# Altium PCB acqboard.PcbDoc (part 3 of 5)
Units mil, origin at the board's own origin, x right, y up, seen from the top; angles counter-clockwise.
Board outline 7000 x 5250 mil, 4 copper layers (Top Layer, Internal Plane 1, Internal Plane 2, Bottom Layer); 570 components, 356 nets, 1973 pads, 766 vias.
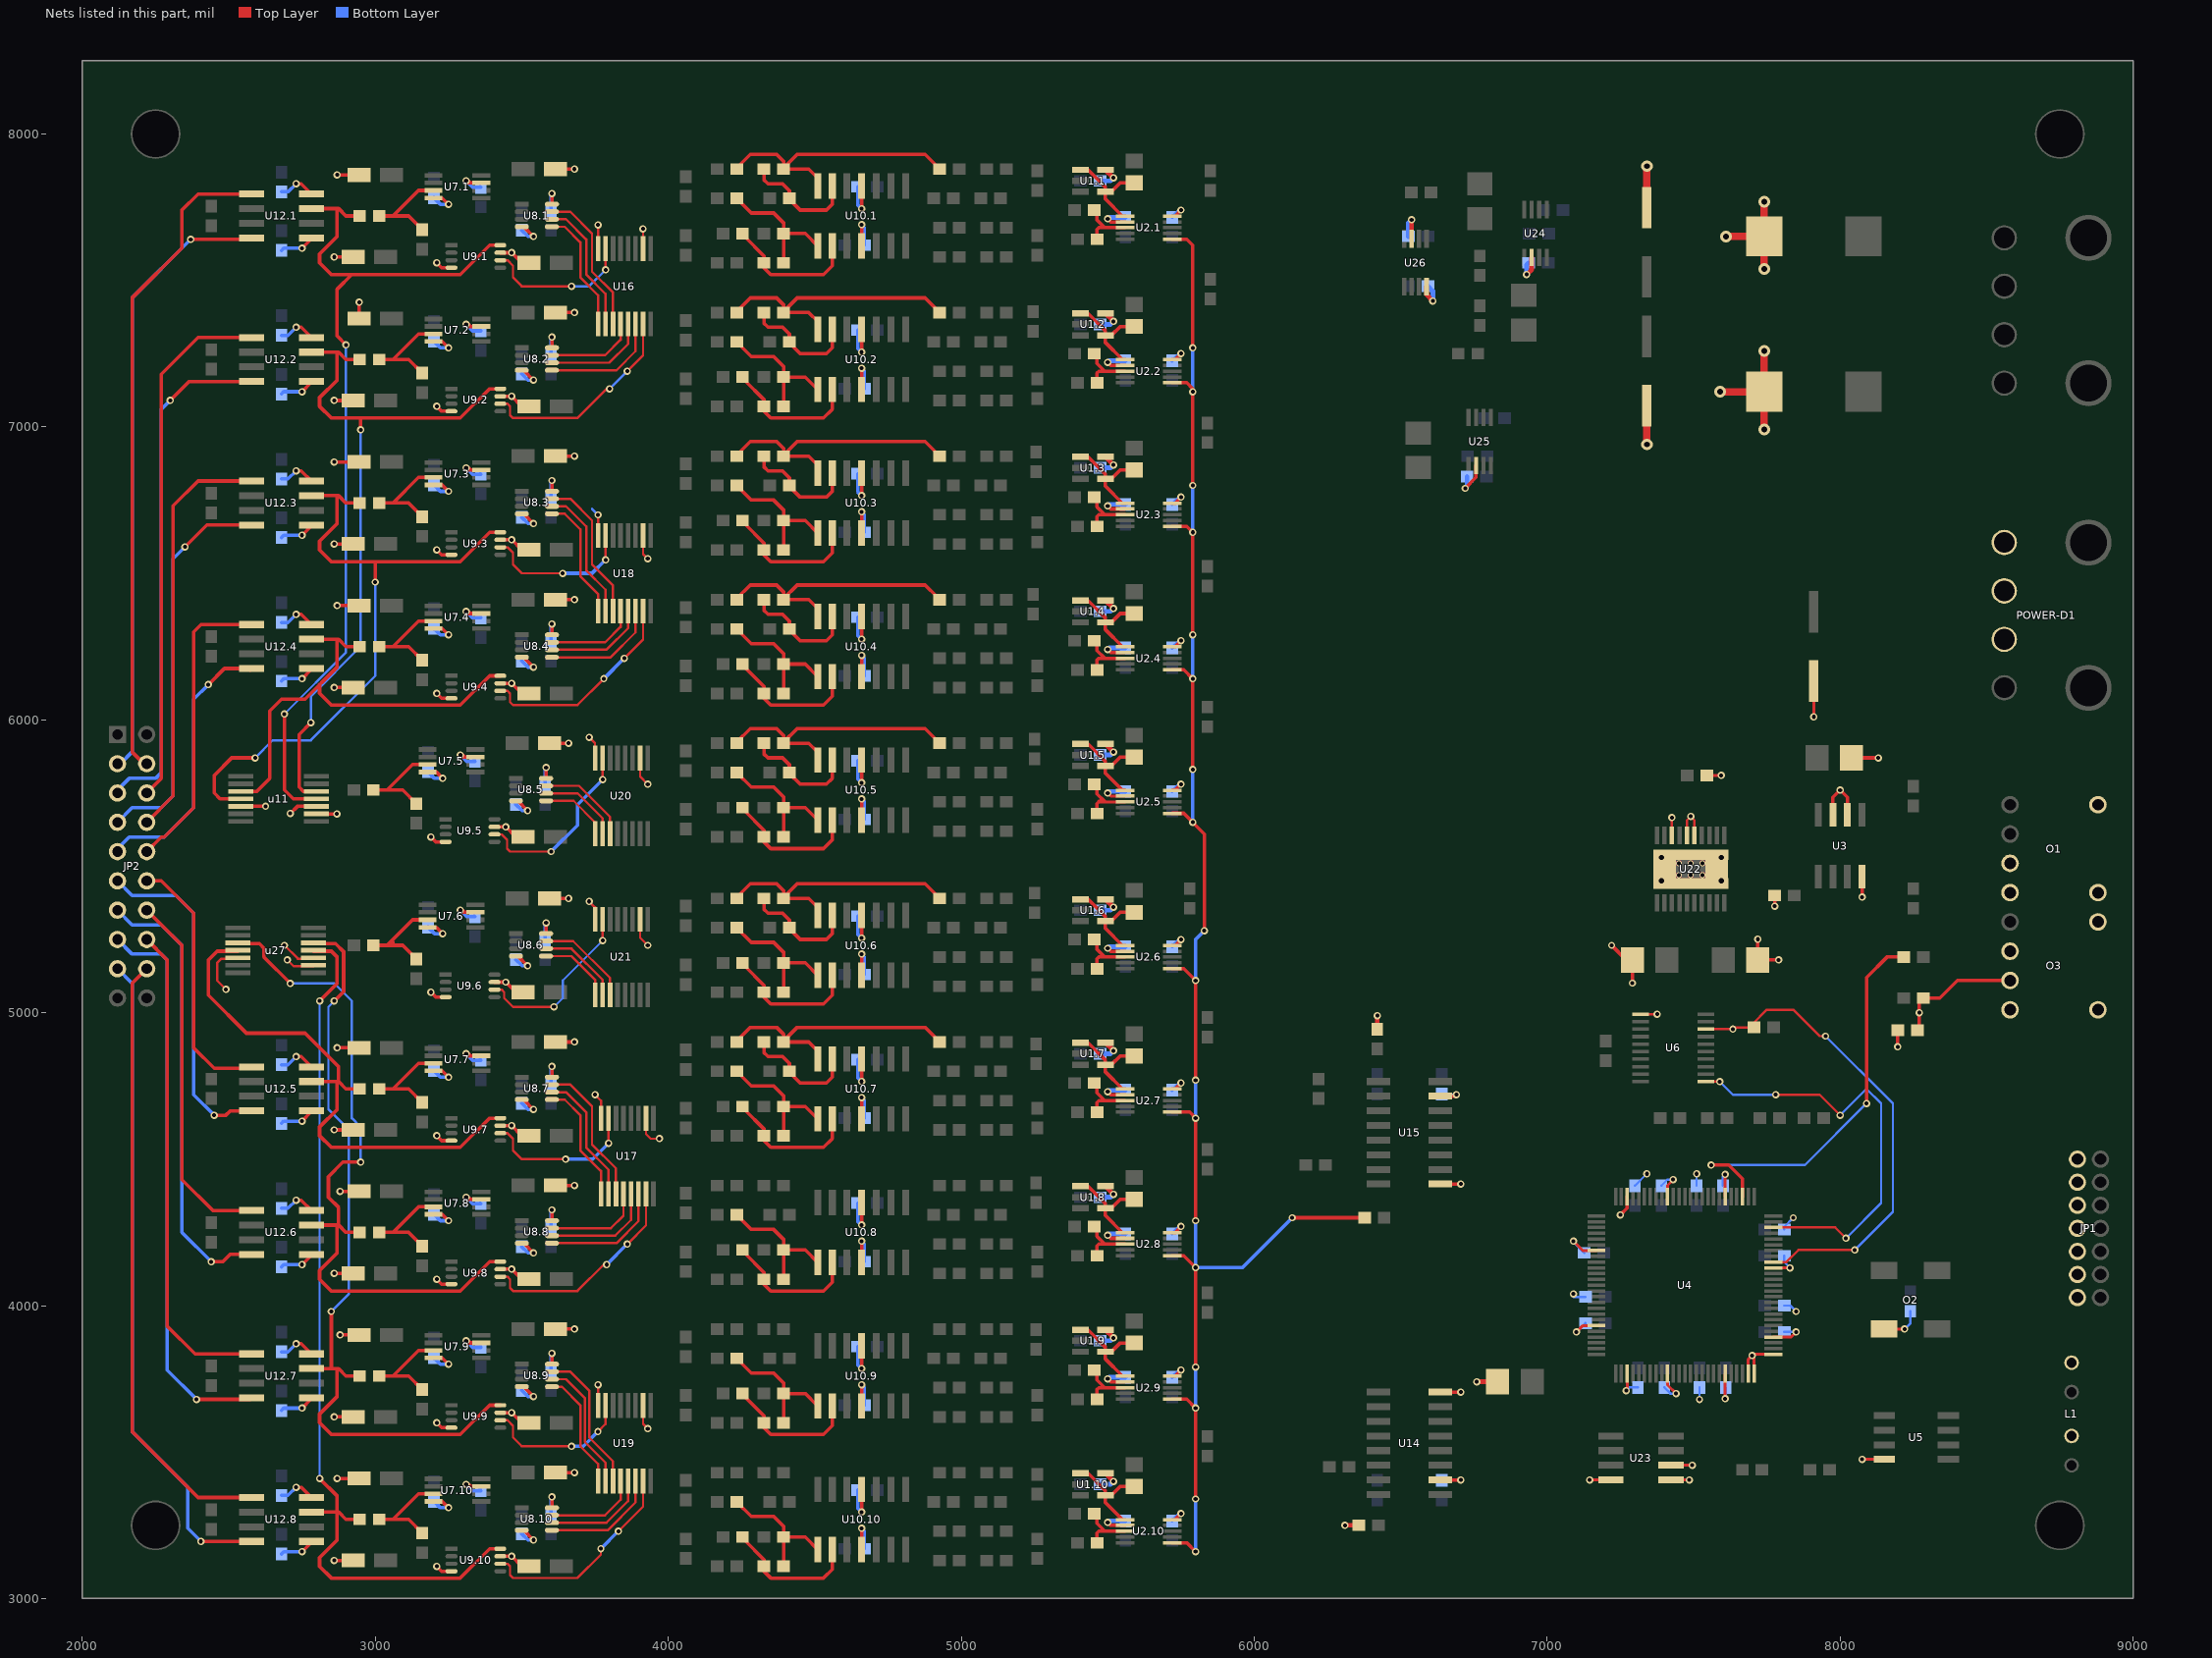
[diagram p5: the nets of this part, all layers, seen from the top]

## Via types
v1: diameter 25, hole 13.5, Top Layer to Bottom Layer, 753 vias
v2: diameter 40, hole 20, Top Layer to Bottom Layer, 13 vias

## Nets (pads, with @x,y where several pads share a name; then routed paths per layer and width w, separated by ;. In a path a pad name is that pad's centre, name@x,y a point inside that pad or via, vN(x,y) a via of type N, cw(c..) or ccw(c..) an arc to the next point about the centre after c; other vN are vias at no path point) (continued)
AVDD: C1.1.1 C1.2.1 C1.3.1 C1.4.1 C1.5.1 C1.6.1 C1.7.1 C1.8.1 C1.9.1 C1.10.1 C3.1.2 C3.2.2 C3.3.2 C3.4.2 C3.5.2 C3.6.2 C3.7.2 C3.8.2 C3.9.2 C3.10.2 C5.1.2 C5.2.2 C5.3.2 C5.4.2 C5.5.2 C5.6.2 C5.7.2 C5.8.2 C5.9.2 C5.10.2 C28.1.1 C28.2.1 C28.3.1 C28.4.1 C28.5.1 C28.6.1 C28.7.1 C28.8.1 C28.9.1 C28.10.1 C29.1.1 C29.2.1 C29.3.1 C29.4.1 C29.5.1 C29.6.1 C29.7.1 C29.8.1 C29.9.1 C29.10.1 C33.1.1 C33.2.1 C33.3.1 C33.4.1 C33.5.1 C33.6.1 C33.7.1 C33.8.1 C33.9.1 C33.10.1 C43.1.1 C43.2.1 C43.3.1 C43.4.1 C43.5.1 C43.6.1 C43.7.1 C43.8.1 C45.1.1 C45.2.1 C45.3.1 C45.4.1 C45.5.1 C45.6.1 C45.7.1 C45.8.1 C55.1 C58.2 C65.1 C69.1 C71.1.2 C71.2.2 C71.3.2 C71.4.2 C71.5.2 C71.6.2 C71.7.2 C71.8.2 C71.9.2 C71.10.2 L2.2 R35.2 R39.2 U1.1.5 U1.2.5 U1.3.5 U1.4.5 U1.5.5 U1.6.5 U1.7.5 U1.8.5 U1.9.5 U1.10.5 U2.1.2 U2.1.10 U2.2.2 U2.2.10 U2.3.2 U2.3.10 U2.4.2 U2.4.10 U2.5.2 U2.5.10 U2.6.2 U2.6.10 U2.7.2 U2.7.10 U2.8.2 U2.8.10 U2.9.2 U2.9.10 U2.10.2 U2.10.10 U7.1.7 U7.2.7 U7.3.7 U7.4.7 U7.5.7 U7.6.7 U7.7.7 U7.8.7 U7.9.7 U7.10.7 U8.1.8 U8.2.8 U8.3.8 U8.4.8 U8.5.8 U8.6.8 U8.7.8 U8.8.8 U8.9.8 U8.10.8 U9.1.4 U9.2.4 U9.3.4 U9.4.4 U9.5.4 U9.6.4 U9.7.4 U9.8.4 U9.9.4 U9.10.4 U10.1.4 U10.2.4 U10.3.4 U10.4.4 U10.5.4 U10.6.4 U10.7.4 U10.8.4 U10.9.4 U10.10.4 u11.2 u11.12 U12.1.8 U12.2.8 U12.3.8 U12.4.8 U12.5.8 U12.6.8 U12.7.8 U12.8.8 U16.10 U16.16 U17.10 U17.16 U18.10 U18.16 U19.10 U19.16 U20.10 U20.16 U21.10 U21.16 U24.2 U25.2 U26.7 u27.2 u27.12 | length 11836.4
  Top Layer w8: v1(2490,5080) 2460,5110 2460,5170 2474.41,5184.41 u27.12@2531.06,5184.41 ; v1(2700,5180) 2721.18,5158.82 u27.2@2788.94,5158.82 ; v1(3730,5380) 3750.43,5359.57 U21.16@3750.43,5318.94 ; v1(3730,5940) 3750,5920 U20.16@3750,5890 ; v1(3750,4720) 3770.43,4699.57 U17.16@3770.43,4638.94 ; U19.16@3760.43,3658.94 v1(3760.43,3729.57) ; U18.16@3760.43,6628.94 v1(3760.43,6699.57) ; U16.16@3760.43,7608.94 v1(3760.43,7689.57) ; U21.10@3903.98,5318.94 3903.98,5256.02 v1(3930,5230) ; U20.10@3903.98,5868.94 3903.98,5806.02 v1(3930,5780) ; U19.10@3913.98,3658.94 3913.98,3596.02 v1(3930,3580) ; U18.10@3913.98,6628.94 3913.98,6566.02 v1(3930,6550) ; U16.10@3913.98,7608.94 v1(3913.98,7676.02) ; U17.10@3923.98,4638.94 3923.98,4586.02 3940,4570 v1(3970,4570)
  Top Layer w10: v1(5500,5750) 5510.31,5739.69 U2.5.2@5559.29,5739.69
  Top Layer w12: u11.12@2541.06,5704.41 v1(2625.59,5704.41) ; v1(2730,3380) 2747.36,3380 U12.8.8@2782.36,3345 ; v1(2730,3870) 2747.36,3870 U12.7.8@2782.36,3835 ; v1(2730,4360) 2747.36,4360 U12.6.8@2782.36,4325 ; v1(2730,4850) 2747.36,4850 U12.5.8@2782.36,4815 ; v1(2730,6360) 2747.36,6360 U12.4.8@2782.36,6325 ; v1(2730,6850) 2747.36,6850 U12.3.8@2782.36,6815 ; v1(2730,7340) 2747.36,7340 U12.2.8@2782.36,7305 ; v1(2730,7830) 2747.36,7830 U12.1.8@2782.36,7795 ; u11.2@2798.94,5678.82 v1(2868.82,5678.82) ; v1(2860,6880) C45.3.1@2944.88,6880 ; v1(2870,3410) C45.8.1@2944.88,3410 ; v1(2870,4880) C45.5.1@2944.88,4880 ; v1(2870,6390) C45.4.1@2944.88,6390 ; v1(2870,7860) C45.1.1@2944.88,7860 ; v1(2880,3900) C45.7.1@2944.88,3900 ; v1(2880,4390) C45.6.1@2944.88,4390 ; C45.2.1@2944.88,7370 v1(2944.88,7425.12) ; v1(3190,5070) 3206.77,5053.23 U9.6.4@3240,5053.23 ; v1(3190,5600) 3206.77,5583.23 U9.5.4@3240,5583.23 ; v1(3210,3110) 3226.77,3093.23 U9.10.4@3260,3093.23 ; v1(3210,3600) 3226.77,3583.23 U9.9.4@3260,3583.23 ; v1(3210,4090) 3226.77,4073.23 U9.8.4@3260,4073.23 ; v1(3210,4580) 3226.77,4563.23 U9.7.4@3260,4563.23 ; v1(3210,6090) 3226.77,6073.23 U9.4.4@3260,6073.23 ; v1(3210,6580) 3226.77,6563.23 U9.3.4@3260,6563.23 ; v1(3210,7070) 3226.77,7053.23 U9.2.4@3260,7053.23 ; v1(3210,7560) 3226.77,7543.23 U9.1.4@3260,7543.23 ; v1(3290,5350) 3298.18,5350 v1@3301.3,5346.89 ; v1(3290,5880) 3298.18,5880 v1@3301.3,5876.89 ; v1@3297.2,5342.8 U7.6.7@3341.69,5342.8 ; v1@3297.2,5872.8 U7.5.7@3341.69,5872.8 ; v1(3310,3390) 3318.18,3390 v1@3321.3,3386.89 ; v1(3310,3880) 3318.18,3880 v1@3321.3,3876.89 ; v1(3310,4370) 3318.18,4370 v1@3321.3,4366.89 ; v1(3310,4860) 3318.18,4860 v1@3321.3,4856.89 ; v1(3310,6370) 3318.18,6370 v1@3321.3,6366.89 ; v1(3310,6860) 3318.18,6860 v1@3321.3,6856.89 ; v1(3310,7350) 3318.18,7350 v1@3321.3,7346.89 ; v1(3310,7840) 3318.18,7840 v1@3321.3,7836.89 ; v1@3317.2,3382.8 U7.10.7@3361.69,3382.8 ; v1@3317.2,3872.8 U7.9.7@3361.69,3872.8 ; v1@3317.2,4362.8 U7.8.7@3361.69,4362.8 ; v1@3317.2,4852.8 U7.7.7@3361.69,4852.8 ; v1@3317.2,6362.8 U7.4.7@3361.69,6362.8 ; v1@3317.2,6852.8 U7.3.7@3361.69,6852.8 ; v1@3317.2,7342.8 U7.2.7@3361.69,7342.8 ; v1@3317.2,7832.8 U7.1.7@3361.69,7832.8 ; U8.6.8@3583.15,5270 v1(3583.15,5306.85) ; U8.5.8@3583.15,5800 v1(3583.15,5836.85) ; C33.6.1@3595.12,5390 v1(3660,5390) ; C33.5.1@3595.12,5920 v1(3660,5920) ; U8.10.8@3603.15,3310 v1(3603.15,3346.85) ; U8.9.8@3603.15,3800 v1(3603.15,3836.85) ; U8.8.8@3603.15,4290 v1(3603.15,4326.85) ; U8.7.8@3603.15,4780 v1(3603.15,4816.85) ; U8.4.8@3603.15,6290 v1(3603.15,6326.85) ; U8.3.8@3603.15,6780 v1(3603.15,6816.85) ; U8.2.8@3603.15,7270 v1(3603.15,7306.85) ; U8.1.8@3603.15,7760 v1(3603.15,7796.85) ; C33.10.1@3615.12,3430 v1(3680,3430) ; C33.9.1@3615.12,3920 v1(3680,3920) ; C33.8.1@3615.12,4410 v1(3680,4410) ; C33.7.1@3615.12,4900 v1(3680,4900) ; C33.4.1@3615.12,6410 v1(3680,6410) ; C33.3.1@3615.12,6900 v1(3680,6900) ; C33.2.1@3615.12,7390 v1(3680,7390) ; C33.1.1@3615.12,7880 v1(3680,7880) ; U10.10.4@4660,3167.64 v1(4660,3240) ; U10.9.4@4660,3657.64 v1(4660,3730) ; U10.8.4@4660,4147.64 v1(4660,4220) ; U10.7.4@4660,4637.64 v1(4660,4710) ; U10.6.4@4660,5127.64 v1(4660,5200) ; U10.5.4@4660,5657.64 v1(4660,5730) ; U10.4.4@4660,6147.64 v1(4660,6220) ; U10.3.4@4660,6637.64 v1(4660,6710) ; U10.2.4@4660,7127.64 v1(4660,7200) ; U10.1.4@4660,7617.64 v1(4660,7690) ; v1(5500,3260) 5510.31,3249.68 U2.10.2@5559.29,3249.68 ; v1(5500,3750) 5510.31,3739.68 U2.9.2@5559.29,3739.68 ; v1(5500,4240) 5510.31,4229.69 U2.8.2@5559.29,4229.69 ; v1(5500,4730) 5510.31,4719.69 U2.7.2@5559.29,4719.69 ; v1(5500,5220) 5510.31,5209.69 U2.6.2@5559.29,5209.69 ; v1(5500,6240) 5510.31,6229.69 U2.4.2@5559.29,6229.69 ; v1(5500,6730) 5510.31,6719.69 U2.3.2@5559.29,6719.69 ; v1(5500,7220) 5510.31,7209.69 U2.2.2@5559.29,7209.69 ; v1(5500,7710) 5510.31,7699.69 U2.1.2@5559.29,7699.69 ; U2.10.10@5720.71,3269.37 5729.37,3269.37 v1(5750,3290) ; U2.9.10@5720.71,3759.37 5729.37,3759.37 v1(5750,3780) ; U2.8.10@5720.71,4249.37 5729.37,4249.37 v1(5750,4270) ; U2.7.10@5720.71,4739.37 5729.37,4739.37 v1(5750,4760) ; U2.6.10@5720.71,5229.37 5729.37,5229.37 v1(5750,5250) ; U2.5.10@5720.71,5759.37 5729.37,5759.37 v1(5750,5780) ; U2.4.10@5720.71,6249.37 5729.37,6249.37 v1(5750,6270) ; U2.3.10@5720.71,6739.37 5729.37,6739.37 v1(5750,6760) ; U2.2.10@5720.71,7229.37 5729.37,7229.37 v1(5750,7250) ; U2.1.10@5720.71,7719.37 5729.37,7719.37 v1(5750,7740) ; v1(6720,6790) 6757.2,6827.2 U25.2@6757.2,6868.31
  Top Layer w16: U1.10.5@5492.32,3427.4 5519.72,3400 v1(5520,3400) ; U1.9.5@5492.32,3917.4 5519.72,3890 v1(5520,3890) ; U1.8.5@5492.32,4407.4 5519.72,4380 v1(5520,4380) ; U1.7.5@5492.32,4897.4 5519.72,4870 v1(5520,4870) ; U1.6.5@5492.32,5387.4 5519.72,5360 v1(5520,5360) ; U1.5.5@5492.32,5917.4 5519.72,5890 v1(5520,5890) ; U1.4.5@5492.32,6407.4 5519.72,6380 v1(5520,6380) ; U1.3.5@5492.32,6897.4 5519.72,6870 v1(5520,6870) ; U1.2.5@5492.32,7387.4 5519.72,7360 v1(5520,7360) ; U1.1.5@5492.32,7877.4 5519.72,7850 v1(5520,7850) ; v1(6310,3250) R39.2@6356.54,3250 ; R35.2@6420,4943.46 v1(6420,4990) ; U26.7@6537.2,7641.69 v1(6537.2,7707.2) ; v1(6930,7520) 6947.2,7537.2 U24.2@6947.2,7578.31
  Top Layer w25: v2(7340,6940) C69.1@7340,7071.89 ; v2(7590,7120) L2.2@7741,7120 ; v2(7741,6991) v2(7741,7259)
  Bottom Layer w8: 3740,6720 v1(3760.43,6699.57)
  Bottom Layer w12: C43.8.1@2680,3352.22 2702.22,3352.22 v1(2730,3380) ; C43.7.1@2680,3842.22 2702.22,3842.22 v1(2730,3870) ; C43.6.1@2680,4332.22 2702.22,4332.22 v1(2730,4360) ; C43.5.1@2680,4822.22 2702.22,4822.22 v1(2730,4850) ; C43.4.1@2680,6332.22 2702.22,6332.22 v1(2730,6360) ; C43.3.1@2680,6822.22 2702.22,6822.22 v1(2730,6850) ; C43.2.1@2680,7312.22 2702.22,7312.22 v1(2730,7340) ; C43.1.1@2680,7802.22 2702.22,7802.22 v1(2730,7830) ; v1(3290,5350) 3312.22,5327.78 C29.6.1@3340,5327.78 C29.6.1@3337.78,5330 ; v1(3290,5880) 3312.22,5857.78 C29.5.1@3340,5857.78 C29.5.1@3337.78,5860 ; v1(3310,3390) 3332.22,3367.78 C29.10.1@3360,3367.78 C29.10.1@3357.78,3370 ; v1(3310,3880) 3332.22,3857.78 C29.9.1@3360,3857.78 C29.9.1@3357.78,3860 ; v1(3310,4370) 3332.22,4347.78 C29.8.1@3360,4347.78 C29.8.1@3357.78,4350 ; v1(3310,4860) 3332.22,4837.78 C29.7.1@3360,4837.78 C29.7.1@3357.78,4840 ; v1(3310,6370) 3332.22,6347.78 C29.4.1@3360,6347.78 C29.4.1@3357.78,6350 ; v1(3310,6860) 3332.22,6837.78 C29.3.1@3360,6837.78 C29.3.1@3357.78,6840 ; v1(3310,7350) 3332.22,7327.78 C29.2.1@3360,7327.78 C29.2.1@3357.78,7330 ; v1(3310,7840) 3332.22,7817.78 C29.1.1@3360,7817.78 C29.1.1@3357.78,7820 ; C28.6.1@3580,5247.78 3580,5303.7 v1(3583.15,5306.85) ; C28.5.1@3580,5777.78 3580,5833.7 v1(3583.15,5836.85) ; C28.10.1@3600,3287.78 3600,3343.7 v1(3603.15,3346.85) ; C28.9.1@3600,3777.78 3600,3833.7 v1(3603.15,3836.85) ; C28.8.1@3600,4267.78 3600,4323.7 v1(3603.15,4326.85) ; C28.7.1@3600,4757.78 3600,4813.7 v1(3603.15,4816.85) ; C28.4.1@3600,6267.78 3600,6323.7 v1(3603.15,6326.85) ; C28.3.1@3600,6757.78 3600,6813.7 v1(3603.15,6816.85) ; C28.2.1@3600,7247.78 3600,7303.7 v1(3603.15,7306.85) ; C28.1.1@3600,7737.78 3600,7793.7 v1(3603.15,7796.85) ; v1(4660,3240) 4669.15,3230.85 C71.10.2@4669.15,3170 ; v1(4660,3730) 4669.15,3720.85 C71.9.2@4669.15,3660 ; v1(4660,4220) 4669.15,4210.85 C71.8.2@4669.15,4150 ; v1(4660,4710) 4669.15,4700.85 C71.7.2@4669.15,4640 ; v1(4660,5200) 4669.15,5190.85 C71.6.2@4669.15,5130 ; v1(4660,5730) 4669.15,5720.85 C71.5.2@4669.15,5660 ; v1(4660,6220) 4669.15,6210.85 C71.4.2@4669.15,6150 ; v1(4660,6710) 4669.15,6700.85 C71.3.2@4669.15,6640 ; v1(4660,7200) 4669.15,7190.85 C71.2.2@4669.15,7130 ; v1(4660,7690) 4669.15,7680.85 C71.1.2@4669.15,7620 ; C3.10.2@5720,3265.21 5744.79,3290 v1(5750,3290) ; C3.9.2@5720,3755.21 5744.79,3780 v1(5750,3780) ; C3.8.2@5720,4245.21 5744.79,4270 v1(5750,4270) ; C3.7.2@5720,4735.21 5744.79,4760 v1(5750,4760) ; C3.6.2@5720,5225.21 5744.79,5250 v1(5750,5250) ; C3.5.2@5720,5755.21 5744.79,5780 v1(5750,5780) ; C3.4.2@5720,6245.21 5744.79,6270 v1(5750,6270) ; C3.3.2@5720,6735.21 5744.79,6760 v1(5750,6760) ; C3.2.2@5720,7225.21 5744.79,7250 v1(5750,7250) ; C3.1.2@5720,7715.21 5744.79,7740 v1(5750,7740)
  Bottom Layer w16: C1.10.1@5473.46,3390 5510,3390 v1(5520,3400) ; C1.9.1@5473.46,3880 5510,3880 v1(5520,3890) ; C1.8.1@5473.46,4370 5510,4370 v1(5520,4380) ; C1.7.1@5473.46,4860 5510,4860 v1(5520,4870) ; C1.6.1@5473.46,5350 5510,5350 v1(5520,5360) ; C1.5.1@5473.46,5880 5510,5880 v1(5520,5890) ; C1.4.1@5473.46,6370 5510,6370 v1(5520,6380) ; C1.3.1@5473.46,6860 5510,6860 v1(5520,6870) ; C1.2.1@5473.46,7350 5510,7350 v1(5520,7360) ; C1.1.1@5473.46,7840 5510,7840 v1(5520,7850) ; v1(5500,3260) 5505.21,3265.21 C5.10.2@5560,3265.21 ; v1(5500,3750) 5505.21,3755.21 C5.9.2@5560,3755.21 ; v1(5500,4240) 5505.21,4245.21 C5.8.2@5560,4245.21 ; v1(5500,4730) 5505.21,4735.21 C5.7.2@5560,4735.21 ; v1(5500,5220) 5505.21,5225.21 C5.6.2@5560,5225.21 ; v1(5500,5750) 5505.21,5755.21 C5.5.2@5560,5755.21 ; v1(5500,6240) 5505.21,6245.21 C5.4.2@5560,6245.21 ; v1(5500,6730) 5505.21,6735.21 C5.3.2@5560,6735.21 ; v1(5500,7220) 5505.21,7225.21 C5.2.2@5560,7225.21 ; v1(5500,7710) 5505.21,7715.21 C5.1.2@5560,7715.21 ; C58.2@6526.54,7650 6526.54,7696.54 v1(6537.2,7707.2) ; v1(6720,6790) 6726.54,6796.54 C65.1@6726.54,6830 ; v1(6930,7520) 6930,7553.46 C55.1@6936.54,7560
AVSS: C31.1.1 C31.2.1 C31.3.1 C31.4.1 C31.5.1 C31.6.1 C31.7.1 C31.8.1 C31.9.1 C31.10.1 C32.1.2 C32.2.2 C32.3.2 C32.4.2 C32.5.2 C32.6.2 C32.7.2 C32.8.2 C32.9.2 C32.10.2 C34.1.2 C34.2.2 C34.3.2 C34.4.2 C34.5.2 C34.6.2 C34.7.2 C34.8.2 C34.9.2 C34.10.2 C44.1.1 C44.2.1 C44.3.1 C44.4.1 C44.5.1 C44.6.1 C44.7.1 C44.8.1 C46.1.2 C46.2.2 C46.3.2 C46.4.2 C46.5.2 C46.6.2 C46.7.2 C46.8.2 C59.2 C70.2 C72.1.1 C72.2.1 C72.3.1 C72.4.1 C72.5.1 C72.6.1 C72.7.1 C72.8.1 C72.9.1 C72.10.1 L3.2 U7.1.4 U7.2.4 U7.3.4 U7.4.4 U7.5.4 U7.6.4 U7.7.4 U7.8.4 U7.9.4 U7.10.4 U8.1.4 U8.2.4 U8.3.4 U8.4.4 U8.5.4 U8.6.4 U8.7.4 U8.8.4 U8.9.4 U8.10.4 U9.1.7 U9.2.7 U9.3.7 U9.4.7 U9.5.7 U9.6.7 U9.7.7 U9.8.7 U9.9.7 U9.10.7 U10.1.11 U10.2.11 U10.3.11 U10.4.11 U10.5.11 U10.6.11 U10.7.11 U10.8.11 U10.9.11 U10.10.11 u11.3 U12.1.5 U12.2.5 U12.3.5 U12.4.5 U12.5.5 U12.6.5 U12.7.5 U12.8.5 U26.4 u27.3 | length 7238
  Top Layer w8: v1(2690,5230) 2735.59,5184.41 u27.3@2788.94,5184.41
  Top Layer w12: v1(2710,5680) 2734.41,5704.41 u11.3@2798.94,5704.41 ; v1(2750,3160) 2782.36,3192.36 U12.8.5@2782.36,3195 ; v1(2750,3650) 2782.36,3682.36 U12.7.5@2782.36,3685 ; v1(2750,4140) 2782.36,4172.36 U12.6.5@2782.36,4175 ; v1(2750,4630) 2782.36,4662.36 U12.5.5@2782.36,4665 ; v1(2750,6140) 2782.36,6172.36 U12.4.5@2782.36,6175 ; v1(2750,6630) 2782.36,6662.36 U12.3.5@2782.36,6665 ; v1(2750,7120) 2782.36,7152.36 U12.2.5@2782.36,7155 ; v1(2750,7610) 2782.36,7642.36 U12.1.5@2782.36,7645 ; v1(2860,3130) C46.8.2@2924.88,3130 ; v1(2860,3620) C46.7.2@2924.88,3620 ; v1(2860,4110) C46.6.2@2924.88,4110 ; v1(2860,4600) C46.5.2@2924.88,4600 ; v1(2860,6110) C46.4.2@2924.88,6110 ; v1(2860,6600) C46.3.2@2924.88,6600 ; v1(2860,7090) C46.2.2@2924.88,7090 ; v1(2860,7580) C46.1.2@2924.88,7580 ; U7.6.4@3178.31,5291.61 3208.39,5291.61 v1(3230,5270) ; U7.5.4@3178.31,5821.61 3208.39,5821.61 v1(3230,5800) ; U7.10.4@3198.31,3331.61 3228.39,3331.61 v1(3250,3310) ; U7.9.4@3198.31,3821.61 3228.39,3821.61 v1(3250,3800) ; U7.8.4@3198.31,4311.61 3228.39,4311.61 v1(3250,4290) ; U7.7.4@3198.31,4801.61 3228.39,4801.61 v1(3250,4780) ; U7.4.4@3198.31,6311.61 3228.39,6311.61 v1(3250,6290) ; U7.3.4@3198.31,6801.61 3228.39,6801.61 v1(3250,6780) ; U7.2.4@3198.31,7291.61 3228.39,7291.61 v1(3250,7270) ; U7.1.4@3198.31,7781.61 3228.39,7781.61 v1(3250,7760) ; U9.6.7@3406.93,5104.41 v1(3445.59,5104.41) 3480,5070 C34.6.2@3504.88,5070 ; U9.5.7@3406.93,5634.41 v1(3445.59,5634.41) 3480,5600 C34.5.2@3504.88,5600 ; U9.10.7@3426.93,3144.41 v1(3465.59,3144.41) 3500,3110 C34.10.2@3524.88,3110 ; U9.9.7@3426.93,3634.41 v1(3465.59,3634.41) 3500,3600 C34.9.2@3524.88,3600 ; U9.8.7@3426.93,4124.41 v1(3465.59,4124.41) 3500,4090 C34.8.2@3524.88,4090 ; U9.7.7@3426.93,4614.41 v1(3465.59,4614.41) 3500,4580 C34.7.2@3524.88,4580 ; U9.4.7@3426.93,6124.41 v1(3465.59,6124.41) 3500,6090 C34.4.2@3524.88,6090 ; U9.3.7@3426.93,6614.41 v1(3465.59,6614.41) 3500,6580 C34.3.2@3524.88,6580 ; U9.2.7@3426.93,7104.41 v1(3465.59,7104.41) 3500,7070 C34.2.2@3524.88,7070 ; U9.1.7@3426.93,7594.41 v1(3465.59,7594.41) 3500,7560 C34.1.2@3524.88,7560 ; U8.6.4@3480,5193.23 3486.77,5193.23 v1(3520,5160) ; U8.5.4@3480,5723.23 3486.77,5723.23 v1(3520,5690) ; U8.10.4@3500,3233.23 3506.77,3233.23 v1(3540,3200) ; U8.9.4@3500,3723.23 3506.77,3723.23 v1(3540,3690) ; U8.8.4@3500,4213.23 3506.77,4213.23 v1(3540,4180) ; U8.7.4@3500,4703.23 3506.77,4703.23 v1(3540,4670) ; U8.4.4@3500,6213.23 3506.77,6213.23 v1(3540,6180) ; U8.3.4@3500,6703.23 3506.77,6703.23 v1(3540,6670) ; U8.2.4@3500,7193.23 3506.77,7193.23 v1(3540,7160) ; U8.1.4@3500,7683.23 3506.77,7683.23 v1(3540,7650) ; v1(4660,3295) U10.10.11@4660,3372.36 ; v1(4660,3785) U10.9.11@4660,3862.36 ; v1(4660,4275) U10.8.11@4660,4352.36 ; v1(4660,4765) U10.7.11@4660,4842.36 ; v1(4660,5255) U10.6.11@4660,5332.36 ; v1(4660,5785) U10.5.11@4660,5862.36 ; v1(4660,6275) U10.4.11@4660,6352.36 ; v1(4660,6765) U10.3.11@4660,6842.36 ; v1(4660,7255) U10.2.11@4660,7332.36 ; v1(4660,7745) U10.1.11@4660,7822.36
  Top Layer w16: U26.4@6588.39,7478.31 6588.39,7451.61 v1(6610,7430)
  Top Layer w25: C70.2@7340,7760 v2(7340,7890) ; v2(7610,7650) L3.2@7741,7650 ; v2(7741,7539) v2(7741,7769)
  Bottom Layer w12: C44.8.1@2680,3152.22 2687.78,3160 v1(2750,3160) ; C44.7.1@2680,3642.22 2687.78,3650 v1(2750,3650) ; C44.6.1@2680,4132.22 2687.78,4140 v1(2750,4140) ; C44.5.1@2680,4622.22 2687.78,4630 v1(2750,4630) ; C44.4.1@2680,6132.22 2687.78,6140 v1(2750,6140) ; C44.3.1@2680,6622.22 2687.78,6630 v1(2750,6630) ; C44.2.1@2680,7112.22 2687.78,7120 v1(2750,7120) ; C44.1.1@2680,7602.22 2687.78,7610 v1(2750,7610) ; C31.6.1@3180,5292.22 3202.22,5270 v1(3230,5270) ; C31.5.1@3180,5822.22 3202.22,5800 v1(3230,5800) ; C31.10.1@3200,3332.22 3222.22,3310 v1(3250,3310) ; C31.9.1@3200,3822.22 3222.22,3800 v1(3250,3800) ; C31.8.1@3200,4312.22 3222.22,4290 v1(3250,4290) ; C31.7.1@3200,4802.22 3222.22,4780 v1(3250,4780) ; C31.4.1@3200,6312.22 3222.22,6290 v1(3250,6290) ; C31.3.1@3200,6802.22 3222.22,6780 v1(3250,6780) ; C31.2.1@3200,7292.22 3222.22,7270 v1(3250,7270) ; C31.1.1@3200,7782.22 3222.22,7760 v1(3250,7760) ; C32.6.2@3480,5180.85 3500.85,5160 v1(3520,5160) ; C32.5.2@3480,5710.85 3500.85,5690 v1(3520,5690) ; C32.10.2@3500,3220.85 3520.85,3200 v1(3540,3200) ; C32.9.2@3500,3710.85 3520.85,3690 v1(3540,3690) ; C32.8.2@3500,4200.85 3520.85,4180 v1(3540,4180) ; C32.7.2@3500,4690.85 3520.85,4670 v1(3540,4670) ; C32.4.2@3500,6200.85 3520.85,6180 v1(3540,6180) ; C32.3.2@3500,6690.85 3520.85,6670 v1(3540,6670) ; C32.2.2@3500,7180.85 3520.85,7160 v1(3540,7160) ; C32.1.2@3500,7670.85 3520.85,7650 v1(3540,7650) ; C72.10.1@4646.54,3370 4646.54,3308.46 v1(4660,3295) ; C72.9.1@4646.54,3860 4646.54,3798.46 v1(4660,3785) ; C72.8.1@4646.54,4350 4646.54,4288.46 v1(4660,4275) ; C72.7.1@4646.54,4840 4646.54,4778.46 v1(4660,4765) ; C72.6.1@4646.54,5330 4646.54,5268.46 v1(4660,5255) ; C72.5.1@4646.54,5860 4646.54,5798.46 v1(4660,5785) ; C72.4.1@4646.54,6350 4646.54,6288.46 v1(4660,6275) ; C72.3.1@4646.54,6840 4646.54,6778.46 v1(4660,6765) ; C72.2.1@4646.54,7330 4646.54,7268.46 v1(4660,7255) ; C72.1.1@4646.54,7820 4646.54,7758.46 v1(4660,7745)
  Bottom Layer w16: C59.2@6593.46,7480 6610,7463.46 v1(6610,7430)
C\O\N\V\S\T\: R40.1 U2.1.6 U2.2.6 U2.3.6 U2.4.6 U2.5.6 U2.6.6 U2.7.6 U2.8.6 U2.9.6 U2.10.6 | length 6007.4
  Top Layer w12: U2.10.6@5720.71,3190.63 5769.37,3190.63 v1(5800,3160) ; U2.9.6@5720.71,3680.63 5769.37,3680.63 v1(5800,3650) v1(5800,3340) ; U2.8.6@5720.71,4170.63 5759.37,4170.63 v1(5800,4130) v1(5800,3790) ; U2.7.6@5720.71,4660.63 5779.37,4660.63 v1(5800,4640) v1(5800,4290) ; U2.6.6@5720.71,5150.63 5759.37,5150.63 v1(5800,5110) v1(5800,4770) ; U2.5.6@5720.71,5680.63 5759.37,5680.63 5830,5610 v1(5830,5280) ; U2.4.6@5720.71,6170.63 5759.37,6170.63 v1(5790,6140) v1(5790,5830) ; U2.3.6@5720.71,6660.63 5769.37,6660.63 v1(5790,6640) v1(5790,6290) ; U2.2.6@5720.71,7150.63 5769.37,7150.63 5790,7130 v1(5790,6800) ; U2.1.6@5720.71,7640.63 5769.37,7640.63 5790,7620 v1(5790,7270) ; v1(6130,4300) R40.1@6376.54,4300
  Bottom Layer w12: v1(5790,5650) v1(5790,5830) ; v1(5790,6140) v1(5790,6290) ; v1(5790,6640) v1(5790,6800) ; v1(5790,7120) v1(5790,7270) ; v1(5800,3160) v1(5800,3340) ; v1(5800,3650) v1(5800,3790) ; v1(5800,4290) v1(5800,4130) 5960,4130 v1(6130,4300) ; v1(5800,4640) v1(5800,4770) ; v1(5800,5110) 5800,5250 v1(5830,5280)
FDIN: U4.48 U6.1 | length 1477.1
  Top Layer w8: U6.1@7541.22,4764.84 v1(7589.16,4764.84) ; U4.48@7772.17,4266.85 7983.15,4266.85 v1(8020,4230) ; v1(7780,4720) 7930,4720 v1(8000,4650)
  Bottom Layer w8: v1(7589.16,4764.84) 7634,4720 v1(7780,4720) ; v1(8000,4650) 8090,4740 8140,4690 8140,4350 v1(8020,4230)
FIBERIN: R3.1 U4.53 | length 1389.8
  Top Layer w12: v1(7560,4480) 7620,4480 7666.85,4433.15 U4.53@7666.85,4372.17 ; v1(8090,4690) 8090,5120 8160,5190 R3.1@8216.54,5190
  Bottom Layer w8: v1(7560,4480) 7880,4480 v1(8090,4690)
FINIT_B: R8.1 U4.42 U6.8 | length 1649.8
  Top Layer w8: U6.8@7541.22,4943.98 v1(7633.98,4943.98) 7640,4950 R8.1@7706.54,4950 ; R8.1@7700,4960 7750,5010 7840,5010 7930,4920 v1(7950,4920) ; U4.42@7772.17,4148.74 7816.22,4148.74 7857.48,4190 v1(8050,4190)
  Bottom Layer w8: v1(7950,4920) 8180,4690 8180,4320 v1(8050,4190)
GA1: U8.1.5 U16.1 | length 422.9
  Top Layer w8: U8.1.5@3603.15,7683.23 3646.77,7683.23 3700,7630 3700,7510 3760.43,7449.57 U16.1@3760.43,7351.06
GA2: U8.2.5 U16.6 | length 404.9
  Top Layer w8: U8.2.5@3603.15,7193.23 3823.23,7193.23 3888.39,7258.39 U16.6@3888.39,7351.06
GA3: U8.3.5 U18.1 | length 422.9
  Top Layer w8: U8.3.5@3603.15,6703.23 3646.77,6703.23 3700,6650 3700,6490 3760.43,6429.57 U18.1@3760.43,6371.06
GA4: U8.4.5 U18.6 | length 393.2
  Top Layer w8: U8.4.5@3603.15,6213.23 3803.23,6213.23 3888.39,6298.39 U18.6@3888.39,6371.06
GA5: U8.5.5 U20.1 | length 236.3
  Top Layer w8: U8.5.5@3583.15,5723.23 3676.77,5723.23 3750.43,5649.57 U20.1@3750.43,5611.06
GA6: U8.6.5 U21.1 | length 252.3
  Top Layer w8: U8.6.5@3583.15,5193.23 3670,5193.23 3750.43,5112.8 U21.1@3750.43,5061.06
GA7: U8.7.5 U17.1 | length 417
  Top Layer w8: U8.7.5@3603.15,4703.23 3646.77,4703.23 3700,4650 3700,4530 3770.43,4459.57 U17.1@3770.43,4381.06
GA8: U8.8.5 U17.6 | length 419
  Top Layer w8: U8.8.5@3603.15,4213.23 3823.23,4213.23 3898.39,4288.39 U17.6@3898.39,4381.06
GA9: U8.9.5 U19.1 | length 407
  Top Layer w8: U8.9.5@3603.15,3723.23 3636.77,3723.23 3700,3660 3700,3520 3760.43,3459.57 U19.1@3760.43,3401.06
GA10: U8.10.5 U19.6 | length 397.3
  Top Layer w8: U8.10.5@3603.15,3233.23 3793.23,3233.23 3888.39,3328.39 U19.6@3888.39,3401.06
GB1: U8.1.6 U16.2 | length 461.6
  Top Layer w8: U8.1.6@3603.15,7708.82 3651.18,7708.82 3720,7640 3720,7520 3786.02,7453.98 U16.2@3786.02,7351.06
GB2: U8.2.6 U16.5 | length 354.4
  Top Layer w8: U8.2.6@3603.15,7218.82 3798.82,7218.82 3862.8,7282.8 U16.5@3862.8,7351.06
GB3: U8.3.6 U18.2 | length 461.6
  Top Layer w8: U8.3.6@3603.15,6728.82 3651.18,6728.82 3720,6660 3720,6510 3786.02,6443.98 U18.2@3786.02,6371.06
GB4: U8.4.6 U18.5 | length 361.2
  Top Layer w8: U8.4.6@3590,6240 3790,6240 3862.8,6312.8 U18.5@3862.8,6371.06
GB5: U8.5.6 U20.2 | length 280.9
  Top Layer w8: U8.5.6@3583.15,5748.82 3691.18,5748.82 3776.02,5663.98 U20.2@3776.02,5611.06
GB6: U8.6.6 U21.2 | length 288.5
  Top Layer w8: U8.6.6@3583.15,5218.82 3670,5218.82 3776.02,5112.79 U21.2@3776.02,5061.06
GB7: U8.7.6 U17.2 | length 455.8
  Top Layer w8: U8.7.6@3603.15,4728.82 3651.18,4728.82 3720,4660 3720,4540 3796.02,4463.98 U17.2@3796.02,4381.06
GB8: U8.8.6 U17.5 | length 380.3
  Top Layer w8: U8.8.6@3603.15,4238.82 3818.82,4238.82 3872.8,4292.8 U17.5@3872.8,4381.06
GB9: U8.9.6 U19.2 | length 451.6
  Top Layer w8: U8.9.6@3603.15,3748.82 3651.18,3748.82 3715,3685 3715,3535 3786.02,3463.98 U19.2@3786.02,3401.06
GB10: U8.10.6 U19.5 | length 358.6
  Top Layer w8: U8.10.6@3603.15,3258.82 3788.82,3258.82 3862.8,3332.8 U19.5@3862.8,3401.06
GC1: U8.1.7 U16.3 | length 506.3
  Top Layer w8: U8.1.7@3603.15,7734.41 3665.59,7734.41 3740,7660 3740,7530 3811.61,7458.39 U16.3@3811.61,7351.06
GC2: U8.2.7 U16.4 | length 309.8
  Top Layer w8: U8.2.7@3603.15,7244.41 3784.41,7244.41 3837.2,7297.2 U16.4@3837.2,7351.06
GC3: U8.3.7 U18.3 | length 506.3
  Top Layer w8: U8.3.7@3603.15,6754.41 3665.59,6754.41 3740,6680 3740,6530 3811.61,6458.39 U18.3@3811.61,6371.06
GC4: U8.4.7 U18.4 | length 309.8
  Top Layer w8: U8.4.7@3603.15,6264.41 3784.41,6264.41 3837.2,6317.2 U18.4@3837.2,6371.06
GC5: U8.5.7 U20.3 | length 319.7
  Top Layer w8: U8.5.7@3583.15,5774.41 3695.59,5774.41 3801.61,5668.39 U20.3@3801.61,5611.06
GC6: U8.6.7 U21.3 | length 328
  Top Layer w8: U8.6.7@3583.15,5244.41 3675.59,5244.41 3801.61,5118.39 U21.3@3801.61,5061.06
GC7: U8.7.7 U17.3 | length 500.4
  Top Layer w8: U8.7.7@3603.15,4754.41 3665.59,4754.41 3740,4680 3740,4550 3821.61,4468.39 U17.3@3821.61,4381.06
GC8: U8.8.7 U17.4 | length 335.6
  Top Layer w8: U8.8.7@3603.15,4264.41 3804.41,4264.41 3847.2,4307.2 U17.4@3847.2,4381.06
GC9: U8.9.7 U19.3 | length 496.3
  Top Layer w8: U8.9.7@3603.15,3774.41 3665.59,3774.41 3730,3710 3730,3550 3811.61,3468.39 U19.3@3811.61,3401.06
GC10: U8.10.7 U19.4 | length 319.8
  Top Layer w8: U8.10.7@3603.15,3284.41 3784.41,3284.41 3837.2,3337.2 U19.4@3837.2,3401.06
GND: C8.2 C9.2 C10.2 C11.2 C12.2 C13.2 C14.2 C15.2 C16.2 C17.2 C18.2 C19.2 C20.2 C21.2 C22.2 C23.2 C24.2 C25.2 C26.2 C50.1 C52.1 C53.2 C61.2 C62.2 C67.2 C68.2 JP1.1 JP1.3 JP1.5 JP1.7 JP1.9 JP1.11 JP1.13 L1.2 L1.4 O1.3 O1.4 O1.5 O1.8 O2.4 O3.2 O3.4 O3.5 O3.8 POWER-D1.1 POWER-D1.2 POWER-D1.3 U3.4 U3.6 U3.7 U4.3 U4.10 U4.20 U4.24 U4.25 U4.26 U4.29 U4.41 U4.56 U4.66 U4.73 U4.82 U4.95 U5.4 U6.11 U14.2 U14.8 U15.9 U15.15 U22.5 U22.6 U22.8 U22.P1 U22.P2 U22.P3 U22.P4 U22.P5 U22.P6 U22.P7 U22.P8 U22.P9 U22.P10 U22.P11 U22.p12 U22.p16 U22.p17 U23.1 U23.2 U23.8 | length 3729.8
  Top Layer w8: U6.11@7318.78,4995.16 v1(7375.16,4995.16) ; U22.8@7425.8,5605 v1(7425.8,5665.8) ; U22.6@7477,5605 7477,5657 v1(7490,5670) 7502.6,5657.4 U22.5@7502.6,5605
  Top Layer w10: v1(7090,4220) 7121.89,4188.11 U4.82@7167.83,4188.11 ; v1(7100,3910) 7122.2,3932.2 U4.95@7167.83,3932.2 ; v1(7145,3405) U23.8@7217.64,3405 ; v1(7270,3710) 7273.15,3713.15 U4.3@7273.15,3767.83 ; U4.10@7410.94,3767.83 7410.94,3729.06 v1(7440,3700) ; U4.66@7410.94,4372.17 7410.94,4410.94 v1(7430,4430) ; U23.1@7422.36,3405 v1(7485,3405) ; U23.2@7422.36,3455 v1(7495,3455) ; C53.2@7545.46,5810 v1(7594,5810) ; v1(7607.8,3682.2) U4.20@7607.8,3767.83 ; U4.56@7607.8,4372.17 v1(7607.8,4447.8) ; U4.24@7686.54,3767.83 7686.54,3816.54 7703.78,3833.78 U4.26@7772.17,3833.78 ; v1(7700,3830) 7706.22,3823.78 U4.25@7706.22,3767.83 ; U4.29@7772.17,3892.83 7832.83,3892.83 v1(7850,3910) ; U4.41@7772.17,4129.06 v1(7829.06,4129.06) ; v1(7910,6010) C61.2@7910,6131.89 ; v1(8075,3475) U5.4@8150.75,3475 ; O2.4@8150,3920 v1(8220,3920)
  Top Layer w12: U14.2@6635.31,3405 v1(6705,3405) ; U14.8@6635.31,3705 v1(6705,3705) ; U15.9@6635.31,4415 v1(6705,4415) ; U15.15@6635.31,4715 6685,4715 v1(6690,4720) ; v1(7220,5230) 7270,5180 C68.2@7290.94,5180 v1(7290.94,5100.94) ; v1(7250,4310) 7273.15,4333.15 U4.73@7273.15,4372.17 ; v1(7719.06,5250.94) C67.2@7719.06,5180 v1(7790,5180) ; v1(7776.54,5363.46) C8.2@7776.54,5400 ; U3.7@7975,5675.31 7975,5735 v1(8000,5760) 8025,5735 U3.6@8025,5675.31 ; C11.2@8039.06,5870 v1(8130,5870) ; v1(8075,5395) U3.4@8075,5464.69 ; v1(8196.54,4883.46) C10.2@8196.54,4940
  Top Layer w16: v1(6760,3740) C62.2@6830.94,3740
  Bottom Layer w8: C52.1@6640,3403.46 6703.46,3403.46 v1(6705,3405) ; C50.1@6640,4722.22 6642.22,4720 v1(6690,4720) ; v1(6705,4415) v1@6710,4410 ; v1@7090,4030 C22.2@7130.85,4030 ; v1(7090,4220) 7090,4216.54 C12.2@7126.54,4180 ; v1(7100,3910) 7100.85,3910 C13.2@7130.85,3940 ; v1(7270,3710) 7280.85,3720.85 C14.2@7310,3720.85 ; C19.2@7300,4409.15 7300,4410 v1(7340,4450) ; C23.2@7390,4409.15 7390,4410 7410,4430 v1(7430,4430) ; C26.2@7400,3720.85 7420.85,3700 v1(7440,3700) ; v1(7495,3455) v1@7500,3450 ; C24.2@7510,4409.15 v1(7510,4450) ; v1(7520,3680) C21.2@7520,3720.85 ; C18.2@7600,4409.15 7600,4440 v1(7607.8,4447.8) ; v1(7607.8,3682.2) 7610,3684.41 C15.2@7610,3720.85 ; C16.2@7809.15,3910 v1(7850,3910) ; C25.2@7809.15,4000 7830,4000 v1(7850,3980) ; C20.2@7809.15,4170 7809.15,4148.96 v1(7829.06,4129.06) ; C17.2@7809.15,4260 7809.15,4269.15 v1(7840,4300) ; v1@8070,3470 v1(8075,3475) ; v1(8220,3920) 8240,3940 C9.2@8240,3980.85
  other v1: 7090,4040
H0: U9.1.6 U16.15 | length 515.4
  Top Layer w8: U9.1.6@3426.93,7568.82 3451.18,7568.82 3470,7550 3470,7510 3500,7480 v1(3670,7480) ; v1(3786.02,7536.02) U16.15@3786.02,7608.94
  Bottom Layer w8: v1(3670,7480) 3730,7480 v1(3786.02,7536.02)
H1: U9.2.6 U16.7 | length 720.6
  Top Layer w8: U9.2.6@3426.93,7078.82 3451.18,7078.82 3460,7070 3460,7040 3470,7030 3690,7030 3790,7130 v1(3800,7130) ; v1(3860,7190) 3913.98,7243.98 U16.7@3913.98,7351.06
  Bottom Layer w8: v1(3800,7130) v1(3860,7190)
H2: U9.3.6 U18.15 | length 521.3
  Top Layer w8: U9.3.6@3426.93,6588.82 3451.18,6588.82 3470,6570 3470,6530 3500,6500 v1(3640,6500) ; v1(3786.02,6546.02) U18.15@3786.02,6628.94
  Bottom Layer w12: v1(3640,6500) 3740,6500 v1(3786.02,6546.02)
H3: U9.4.6 U18.7 | length 714.7
  Top Layer w8: U9.4.6@3426.93,6098.82 3451.18,6098.82 3460,6090 3460,6060 3470,6050 3690,6050 v1(3780,6140) ; v1(3850,6210) 3913.98,6273.98 U18.7@3913.98,6371.06
  Bottom Layer w12: v1(3780,6140) v1(3850,6210)
H4: U9.5.6 U20.15 | length 626.9
  Top Layer w8: U9.5.6@3406.93,5608.82 3431.18,5608.82 3450,5590 3450,5560 3460,5550 v1(3600,5550) ; v1(3776.02,5796.02) U20.15@3776.02,5868.94
  Bottom Layer w12: v1(3600,5550) 3690,5640 3690,5710 v1(3776.02,5796.02)
H5: U9.6.6 U21.15 | length 606.9
  Top Layer w8: U9.6.6@3406.93,5078.82 3431.18,5078.82 3440,5070 3440,5050 3470,5020 v1(3610,5020) ; v1(3776.02,5246.02) U21.15@3776.02,5318.94
  Bottom Layer w8: v1(3610,5020) 3640,5050 3640,5110 v1(3776.02,5246.02)
H6: U9.7.6 U17.15 | length 536.6
  Top Layer w8: U9.7.6@3426.93,4588.82 3451.18,4588.82 3470,4570 3470,4530 3500,4500 v1(3650,4500) ; v1(3796.02,4553.98) U17.15@3796.02,4638.94
  Bottom Layer w12: v1(3650,4500) 3742.05,4500 v1(3796.02,4553.98)
H7: U9.8.6 U17.7 | length 734.7
  Top Layer w8: U9.8.6@3426.93,4098.82 3451.18,4098.82 3460,4090 3460,4060 3470,4050 3690,4050 3780,4140 v1(3790,4140) ; v1(3860,4210) 3923.98,4273.98 U17.7@3923.98,4381.06
  Bottom Layer w12: v1(3790,4140) v1(3860,4210)
H8: U9.9.6 U19.15 | length 513.7
  Top Layer w8: U9.9.6@3426.93,3608.82 3451.18,3608.82 3470,3590 3470,3550 3500,3520 v1(3670,3520) ; v1(3760,3570) 3786.02,3596.02 U19.15@3786.02,3658.94
  Bottom Layer w12: v1(3670,3520) 3710,3520 v1(3760,3570)
H9: U9.10.6 U19.7 | length 724.7
  Top Layer w8: U9.10.6@3426.93,3118.82 3451.18,3118.82 3460,3110 3460,3080 3470,3070 3690,3070 3770,3150 v1(3770,3170) ; v1(3830,3230) 3913.98,3313.98 U19.7@3913.98,3401.06
  Bottom Layer w12: v1(3770,3170) v1(3830,3230)
IN+1: JP2.4 U12.1.1 | length 2247.4
  Top Layer w12: JP2.4@2220,5850 2210,5850 2170,5890 2170,7440 2340,7610 2340,7740 2395,7795 U12.1.1@2577.64,7795
IN+2: JP2.6 U12.2.1 | length 1810.1
  Top Layer w12: JP2.6@2220,5750 2270,5800 2270,7180 2395,7305 U12.2.1@2577.64,7305
IN+3: JP2.8 U12.3.1 | length 1420.1
  Top Layer w12: JP2.8@2220,5650 2310,5740 2310,6730 2395,6815 U12.3.1@2577.64,6815
IN+4: JP2.10 U12.4.1 | length 1030.1
  Top Layer w12: JP2.10@2220,5550 2270,5600 2280,5600 2380,5700 2380,6300 2405,6325 U12.4.1@2577.64,6325
IN+5: JP2.12 U12.5.1 | length 904.6
  Top Layer w12: JP2.12@2220,5450 2270,5450 2380,5340 2380,4880 2450,4810 U12.5.1@2590,4810
IN+6: JP2.14 U12.6.1 | length 1250.8
  Top Layer w12: JP2.14@2220,5350 2340,5230 2340,4430 2445,4325 U12.6.1@2577.64,4325
IN+7: JP2.16 U12.7.1 | length 1676
  Top Layer w12: JP2.16@2220,5250 2290,5180 2290,3930 2385,3835 U12.7.1@2577.64,3835
IN+8: JP2.18 U12.8.1 | length 2101.5
  Top Layer w12: JP2.18@2220,5150 2170,5100 2170,3570 2395,3345 U12.8.1@2577.64,3345
IN-1: JP2.3 U12.1.4 | length 2109.1
  Top Layer w12: v1(2370,7640) 2572.64,7640 U12.1.4@2577.64,7645
  Bottom Layer w12: JP2.3@2120,5850 2130,5850 2170,5890 2170,7440 v1(2370,7640)
IN-2: JP2.5 U12.2.4 | length 1783.1
  Top Layer w12: v1(2300,7090) 2365,7155 U12.2.4@2577.64,7155 U12.2.4@2572.64,7150
  Bottom Layer w12: JP2.5@2110,5750 2160,5800 2250,5800 2270,5820 2270,7060 v1(2300,7090)
IN-3: JP2.7 U12.3.4 | length 1359.6
  Top Layer w12: v1(2350,6590) 2425,6665 U12.3.4@2577.64,6665 U12.3.4@2572.64,6660
  Bottom Layer w12: JP2.7@2120,5650 2170,5700 2270,5700 2310,5740 2310,6550 v1(2350,6590)
IN-4: JP2.9 U12.4.4 | length 946.2
  Top Layer w12: v1(2430,6120) 2485,6175 U12.4.4@2577.64,6175 U12.4.4@2572.64,6170
  Bottom Layer w12: JP2.9@2120,5550 2120,5560 2160,5600 2280,5600 2380,5700 2380,6070 v1(2430,6120)
IN-5: JP2.11 U12.5.4 | length 1165.5
  Top Layer w12: v1(2450,4650) 2490,4650 2505,4665 U12.5.4@2577.64,4665 U12.5.4@2572.64,4660
  Bottom Layer w12: JP2.11@2120,5450 2170,5400 2320,5400 2380,5340 2380,4720 v1(2450,4650)
IN-6: JP2.13 U12.6.4 | length 1546.2
  Top Layer w12: v1(2440,4150) 2480,4150 2505,4175 U12.6.4@2577.64,4175 U12.6.4@2572.64,4170
  Bottom Layer w12: JP2.13@2120,5350 2170,5300 2270,5300 2340,5230 2340,4250 v1(2440,4150)
IN-7: JP2.15 U12.7.4 | length 1930.1
  Top Layer w12: v1(2390,3680) 2572.64,3680 U12.7.4@2577.64,3685
  Bottom Layer w12: JP2.15@2120,5250 2170,5200 2270,5200 2290,5180 2290,3780 v1(2390,3680)
IN-8: JP2.17 U12.8.4 | length 2252.8
  Top Layer w12: v1(2405,3195) U12.8.4@2577.64,3195 U12.8.4@2572.64,3190
  Bottom Layer w12: JP2.17@2120,5150 2170,5100 2170,3570 2360,3380 2360,3240 v1(2405,3195)
INAOUT1: C30.1.2 U9.1.8 u11.4 U12.1.7 | length 3060.8
  Top Layer w12: v1(2690,6020) 2690,5760 2720,5730 u11.4@2798.94,5730 ; U12.1.7@2782.36,7745 2875,7745 2900,7720 C30.1.2@2946.54,7720 ; 2870,7745 2870,7650 2810,7590 2810,7560 2850,7520 3290,7520 3390,7620 U9.1.8@3426.93,7620 ; v1(2900,7280) 2870,7310 2870,7470 2920,7520
  Bottom Layer w8: v1(2690,6020) 2900,6230 v1(2900,7280)
INAOUT2: C30.2.2 U9.2.8 u11.5 U12.2.7 | length 2471.2
  Top Layer w12: v1(2780,5990) 2740,5950 2740,5770 2754.41,5755.59 u11.5@2798.94,5755.59 ; U12.2.7@2782.36,7255 2875,7255 2900,7230 C30.2.2@2946.54,7230 ; 2870,7255 2870,7160 2810,7100 2810,7070 2850,7030 3290,7030 3390,7130 U9.2.8@3426.93,7130 ; v1(2950,6990) 2950,7030
  Bottom Layer w8: v1(2780,5990) 2780,6080 2950,6250 v1(2950,6990)
INAOUT3: C30.3.2 U9.3.8 u11.11 U12.3.7 | length 2299.5
  Top Layer w12: u11.11@2541.06,5730 2470,5730 2450,5750 2450,5810 2510,5870 v1(2590,5870) ; U12.3.7@2782.36,6765 2875,6765 2900,6740 C30.3.2@2946.54,6740 ; 2870,6765 2870,6670 2810,6610 2810,6580 2850,6540 3290,6540 3390,6640 U9.3.8@3426.93,6640 ; v1(3000,6470) 3000,6540
  Bottom Layer w8: v1(2590,5870) 2650,5930 2780,5930 3000,6150 v1(3000,6470)
INAOUT4: C30.4.2 U9.4.8 u11.10 U12.4.7 | length 1613.9
  Top Layer w12: u11.10@2541.06,5755.59 2595.59,5755.59 2640,5800 2640,6030 2680,6070 2760,6070 2870,6180 2870,6275 ; U12.4.7@2782.36,6275 2875,6275 2900,6250 C30.4.2@2946.54,6250 ; 2810,6120 2810,6090 2850,6050 3290,6050 3390,6150 U9.4.8@3426.93,6150
INAOUT5: C30.7.2 U9.7.8 U12.5.7 u27.11 | length 1889.3
  Top Layer w12: u27.11@2531.06,5210 2460,5210 2430,5180 2430,5060 2560,4930 2760,4930 2875,4815 2875,4765 ; U12.5.7@2782.36,4765 2875,4765 ; 2870,4765 2870,4670 2810,4610 2810,4580 2850,4540 3290,4540 3390,4640 U9.7.8@3426.93,4640 ; C30.7.2@2946.54,4740 2900,4740 2875,4765
INAOUT6: C30.8.2 U9.8.8 U12.6.7 u27.10 | length 2419.5
  Top Layer w12: u27.10@2531.06,5235.59 2604.41,5235.59 2620,5220 2620,5190 v1(2710,5100) ; U12.6.7@2782.36,4275 2875,4275 ; 2870,4275 2870,4180 2810,4120 2810,4090 2850,4050 3290,4050 3390,4150 U9.8.8@3426.93,4150 ; C30.8.2@2946.54,4250 2900,4250 2875,4275 ; v1(2950,4490) 2890,4490 2840,4440 2840,4370 2875,4335 2875,4275
  Bottom Layer w8: v1(2710,5100) 2860,5100 2920,5040 2920,4640 2950,4610 v1(2950,4490)
INAOUT7: C30.9.2 U9.9.8 U12.7.7 u27.5 | length 2672.1
  Top Layer w12: U12.7.7@2782.36,3785 2875,3785 2900,3760 C30.9.2@2946.54,3760 ; u27.5@2788.94,5235.59 2864.41,5235.59 2891.88,5208.12 2891.88,5071.88 v1(2860,5040) ; 2850,3785 v1(2850,3980) ; 2870,3785 2870,3690 2810,3630 2810,3600 2850,3560 3290,3560 3390,3660 U9.9.8@3426.93,3660
  Bottom Layer w8: v1(2850,3980) 2910,4040 2910,4600 2840,4670 2840,5020 v1(2860,5040)
INAOUT8: C30.10.2 U9.10.8 U12.8.7 u27.4 | length 3093.4
  Top Layer w12: U12.8.7@2782.36,3295 2875,3295 2900,3270 C30.10.2@2946.54,3270 ; u27.4@2788.94,5210 2850,5210 2870,5190 2870,5100 v1(2810,5040) ; v1(2810,3410) 2870,3350 2870,3200 2810,3140 2810,3110 2850,3070 3290,3070 3390,3170 U9.10.8@3426.93,3170
  Bottom Layer w8: v1(2810,3410) v1(2810,5040)
NetC2.1_2: C2.1.2 U1.1.1 U1.1.4 U2.1.1 | length 350.6
  Top Layer w12: U1.1.1@5407.68,7877.4 5432.6,7877.4 5492.32,7817.68 5492.32,7777.68 5550.63,7719.37 U2.1.1@5559.29,7719.37 ; U1.1.4@5492.32,7802.6 5512.6,7802.6 5542.6,7832.6 C2.1.2@5590,7832.6
NetC2.2_2: C2.2.2 U1.2.1 U1.2.4 U2.2.1 | length 350.6
  Top Layer w12: U1.2.1@5407.68,7387.4 5432.6,7387.4 5492.32,7327.68 5492.32,7287.68 5550.63,7229.37 U2.2.1@5559.29,7229.37 ; U1.2.4@5492.32,7312.6 5512.6,7312.6 5542.6,7342.6 C2.2.2@5590,7342.6
NetC2.3_2: C2.3.2 U1.3.1 U1.3.4 U2.3.1 | length 350.6
  Top Layer w12: U1.3.1@5407.68,6897.4 5432.6,6897.4 5492.32,6837.68 5492.32,6797.68 5550.63,6739.37 U2.3.1@5559.29,6739.37 ; U1.3.4@5492.32,6822.6 5512.6,6822.6 5542.6,6852.6 C2.3.2@5590,6852.6
NetC2.4_2: C2.4.2 U1.4.1 U1.4.4 U2.4.1 | length 350.6
  Top Layer w12: U1.4.1@5407.68,6407.4 5432.6,6407.4 5492.32,6347.68 5492.32,6307.68 5550.63,6249.37 U2.4.1@5559.29,6249.37 ; U1.4.4@5492.32,6332.6 5512.6,6332.6 5542.6,6362.6 C2.4.2@5590,6362.6
NetC2.5_2: C2.5.2 U1.5.1 U1.5.4 U2.5.1 | length 350.6
  Top Layer w12: U1.5.1@5407.68,5917.4 5432.6,5917.4 5492.32,5857.68 5492.32,5817.68 5550.63,5759.37 U2.5.1@5559.29,5759.37 ; U1.5.4@5492.32,5842.6 5512.6,5842.6 5542.6,5872.6 C2.5.2@5590,5872.6
NetC2.6_2: C2.6.2 U1.6.1 U1.6.4 U2.6.1 | length 350.6
  Top Layer w12: U1.6.1@5407.68,5387.4 5432.6,5387.4 5492.32,5327.68 5492.32,5287.68 5550.63,5229.37 U2.6.1@5559.29,5229.37 ; U1.6.4@5492.32,5312.6 5512.6,5312.6 5542.6,5342.6 C2.6.2@5590,5342.6
NetC2.7_2: C2.7.2 U1.7.1 U1.7.4 U2.7.1 | length 350.6
  Top Layer w12: U1.7.1@5407.68,4897.4 5432.6,4897.4 5492.32,4837.68 5492.32,4797.68 5550.63,4739.37 U2.7.1@5559.29,4739.37 ; U1.7.4@5492.32,4822.6 5512.6,4822.6 5542.6,4852.6 C2.7.2@5590,4852.6
NetC2.8_2: C2.8.2 U1.8.1 U1.8.4 U2.8.1 | length 350.6
  Top Layer w12: U1.8.1@5407.68,4407.4 5432.6,4407.4 5492.32,4347.68 5492.32,4307.68 5550.63,4249.37 U2.8.1@5559.29,4249.37 ; U1.8.4@5492.32,4332.6 5512.6,4332.6 5542.6,4362.6 C2.8.2@5590,4362.6
NetC2.9_2: C2.9.2 U1.9.1 U1.9.4 U2.9.1 | length 350.6
  Top Layer w12: U1.9.1@5407.68,3917.4 5432.6,3917.4 5492.32,3857.68 5492.32,3817.68 5550.63,3759.37 U2.9.1@5559.29,3759.37 ; U1.9.4@5492.32,3842.6 5512.6,3842.6 5542.6,3872.6 C2.9.2@5590,3872.6
NetC2.10_2: C2.10.2 U1.10.1 U1.10.4 U2.10.1 | length 350.6
  Top Layer w12: U1.10.1@5407.68,3427.4 5432.6,3427.4 5492.32,3367.68 5492.32,3327.68 5550.63,3269.37 U2.10.1@5559.29,3269.37 ; U1.10.4@5492.32,3352.6 5512.6,3352.6 5542.6,3382.6 C2.10.2@5590,3382.6
NetC4.1_2: C4.1.2 R30.1.2 U2.1.3 | length 203
  Top Layer w12: C4.1.2@5463.46,7640 5463.46,7673.46 5470,7680 U2.1.3@5559.29,7680 ; R30.1.2@5463.46,7740 5463.46,7706.54 5490,7680
NetC4.2_2: C4.2.2 R30.2.2 U2.2.3 | length 203
  Top Layer w12: C4.2.2@5463.46,7150 5463.46,7183.46 5470,7190 U2.2.3@5559.29,7190 ; R30.2.2@5463.46,7250 5463.46,7216.54 5490,7190
NetC4.3_2: C4.3.2 R30.3.2 U2.3.3 | length 203
  Top Layer w12: C4.3.2@5463.46,6660 5463.46,6693.46 5470,6700 U2.3.3@5559.29,6700 ; R30.3.2@5463.46,6760 5463.46,6726.54 5490,6700
NetC4.4_2: C4.4.2 R30.4.2 U2.4.3 | length 203
  Top Layer w12: C4.4.2@5463.46,6170 5463.46,6203.46 5470,6210 U2.4.3@5559.29,6210 ; R30.4.2@5463.46,6270 5463.46,6236.54 5490,6210
NetC4.5_2: C4.5.2 R30.5.2 U2.5.3 | length 201
  Top Layer w10: 5480.94,5720 U2.5.3@5559.29,5720
  Top Layer w12: C4.5.2@5463.46,5680 5463.46,5713.46 5470,5720 ; R30.5.2@5463.46,5780 5463.46,5746.54 5489.06,5720.94 ; 5470.71,5720.94 5480.94,5720.94
NetC4.6_2: C4.6.2 R30.6.2 U2.6.3 | length 203
  Top Layer w12: C4.6.2@5463.46,5150 5463.46,5183.46 5470,5190 U2.6.3@5559.29,5190 ; R30.6.2@5463.46,5250 5463.46,5216.54 5490,5190
NetC4.7_2: C4.7.2 R30.7.2 U2.7.3 | length 203
  Top Layer w12: C4.7.2@5463.46,4660 5463.46,4693.46 5470,4700 U2.7.3@5559.29,4700 ; R30.7.2@5463.46,4760 5463.46,4726.54 5490,4700
NetC4.8_2: C4.8.2 R30.8.2 U2.8.3 | length 203
  Top Layer w12: C4.8.2@5463.46,4170 5463.46,4203.46 5470,4210 U2.8.3@5559.29,4210 ; R30.8.2@5463.46,4270 5463.46,4236.54 5490,4210
NetC4.9_2: C4.9.2 R30.9.2 U2.9.3 | length 203
  Top Layer w12: C4.9.2@5463.46,3680 5463.46,3713.46 5470,3720 U2.9.3@5559.29,3720 ; R30.9.2@5463.46,3780 5463.46,3746.54 5490,3720
NetC4.10_2: C4.10.2 R30.10.2 U2.10.3 | length 203
  Top Layer w12: C4.10.2@5463.46,3190 5463.46,3223.46 5470,3230 U2.10.3@5559.29,3230 ; R30.10.2@5463.46,3290 5463.46,3256.54 5490,3230
NetC10_1: C10.1 O3.3 R4.2 | length 437
  Top Layer w12: C10.1@8270,4940 8270,5036.54 R4.2@8283.46,5050 8340,5050 8400,5110 O3.3@8580,5110
  other v1: 8270,5000
NetC30.1_1: C30.1.1 R13.1.2 U7.1.3 | length 340.2
  Top Layer w12: C30.1.1@3013.46,7720 3113.46,7720 R13.1.2@3160,7673.46 ; 3060,7720 3147.2,7807.2 U7.1.3@3198.31,7807.2
NetC30.2_1: C30.2.1 R13.2.2 U7.2.3 | length 340.2
  Top Layer w12: C30.2.1@3013.46,7230 3113.46,7230 R13.2.2@3160,7183.46 ; 3060,7230 3147.2,7317.2 U7.2.3@3198.31,7317.2
NetC30.3_1: C30.3.1 R13.3.2 U7.3.3 | length 340.2
  Top Layer w12: C30.3.1@3013.46,6740 3113.46,6740 R13.3.2@3160,6693.46 ; 3060,6740 3147.2,6827.2 U7.3.3@3198.31,6827.2
NetC30.4_1: C30.4.1 R13.4.2 U7.4.3 | length 340.2
  Top Layer w12: C30.4.1@3013.46,6250 3113.46,6250 R13.4.2@3160,6203.46 ; 3060,6250 3147.2,6337.2 U7.4.3@3198.31,6337.2
NetC30.5_1: C30.5.1 R13.5.2 U7.5.3 | length 340.2
  Top Layer w12: C30.5.1@2993.46,5760 3093.46,5760 R13.5.2@3140,5713.46 ; 3040,5760 3127.2,5847.2 U7.5.3@3178.31,5847.2
NetC30.6_1: C30.6.1 R13.6.2 U7.6.3 | length 350.2
  Top Layer w12: C30.6.1@2993.46,5230 3093.46,5230 R13.6.2@3140,5183.46 ; 3040,5230 3127.2,5317.2 U7.6.3@3178.31,5317.2 ; 3060,5230 3060,5240
NetC30.7_1: C30.7.1 R13.7.2 U7.7.3 | length 340.2
  Top Layer w12: C30.7.1@3013.46,4740 3113.46,4740 R13.7.2@3160,4693.46 ; 3060,4740 3147.2,4827.2 U7.7.3@3198.31,4827.2
NetC30.8_1: C30.8.1 R13.8.2 U7.8.3 | length 340.2
  Top Layer w12: C30.8.1@3013.46,4250 3113.46,4250 R13.8.2@3160,4203.46 ; 3060,4250 3147.2,4337.2 U7.8.3@3198.31,4337.2
NetC30.9_1: C30.9.1 R13.9.2 U7.9.3 | length 340.2
  Top Layer w12: C30.9.1@3013.46,3760 3113.46,3760 R13.9.2@3160,3713.46 ; 3060,3760 3147.2,3847.2 U7.9.3@3198.31,3847.2
NetC30.10_1: C30.10.1 R13.10.2 U7.10.3 | length 340.2
  Top Layer w12: C30.10.1@3013.46,3270 3113.46,3270 R13.10.2@3160,3223.46 ; 3060,3270 3147.2,3357.2 U7.10.3@3198.31,3357.2
NetC35.1_1: C35.1.1 R14.1.1 R18.1.1 U10.1.1 | length 458.7
  Top Layer w12: R18.1.1@4233.46,7780 4283.46,7730 4360,7730 4393.46,7696.54 C35.1.1@4393.46,7560 ; R14.1.1@4400,7660 4467.64,7660 U10.1.1@4510,7617.64
NetC35.1_2: C35.1.2 R17.1.2 U10.1.2 | length 459.7
  Top Layer w12: R17.1.2@4250,7650 4260,7650 4326.54,7583.46 4326.54,7543.46 4350,7520 4530,7520 4560,7550 U10.1.2@4560,7610
NetC35.2_1: C35.2.1 R14.2.1 R18.2.1 U10.2.1 | length 458.7
  Top Layer w12: R18.2.1@4233.46,7290 4283.46,7240 4360,7240 4393.46,7206.54 C35.2.1@4393.46,7070 ; R14.2.1@4400,7170 4467.64,7170 U10.2.1@4510,7127.64
NetC35.2_2: C35.2.2 R17.2.2 U10.2.2 | length 459.7
  Top Layer w12: R17.2.2@4250,7160 4260,7160 4326.54,7093.46 4326.54,7053.46 4350,7030 4530,7030 4560,7060 U10.2.2@4560,7120
NetC35.3_1: C35.3.1 R14.3.1 R18.3.1 U10.3.1 | length 458.7
  Top Layer w12: R18.3.1@4233.46,6800 4283.46,6750 4360,6750 4393.46,6716.54 C35.3.1@4393.46,6580 ; R14.3.1@4400,6680 4467.64,6680 U10.3.1@4510,6637.64
NetC35.3_2: C35.3.2 R17.3.2 U10.3.2 | length 459.7
  Top Layer w12: R17.3.2@4250,6670 4260,6670 4326.54,6603.46 4326.54,6563.46 4350,6540 4530,6540 4560,6570 U10.3.2@4560,6630
NetC35.4_1: C35.4.1 R14.4.1 R18.4.1 U10.4.1 | length 458.7
  Top Layer w12: R18.4.1@4233.46,6310 4283.46,6260 4360,6260 4393.46,6226.54 C35.4.1@4393.46,6090 ; R14.4.1@4400,6190 4467.64,6190 U10.4.1@4510,6147.64
NetC35.4_2: C35.4.2 R17.4.2 U10.4.2 | length 459.7
  Top Layer w12: R17.4.2@4250,6180 4260,6180 4326.54,6113.46 4326.54,6073.46 4350,6050 4530,6050 4560,6080 U10.4.2@4560,6140
NetC35.5_1: C35.5.1 R14.5.1 R18.5.1 U10.5.1 | length 458.7
  Top Layer w12: R18.5.1@4233.46,5820 4283.46,5770 4360,5770 4393.46,5736.54 C35.5.1@4393.46,5600 ; R14.5.1@4400,5700 4467.64,5700 U10.5.1@4510,5657.64
NetC35.5_2: C35.5.2 R17.5.2 U10.5.2 | length 459.7
  Top Layer w12: R17.5.2@4250,5690 4260,5690 4326.54,5623.46 4326.54,5583.46 4350,5560 4530,5560 4560,5590 U10.5.2@4560,5650
NetC35.6_1: C35.6.1 R14.6.1 R18.6.1 U10.6.1 | length 458.7
  Top Layer w12: R18.6.1@4233.46,5290 4283.46,5240 4360,5240 4393.46,5206.54 C35.6.1@4393.46,5070 ; R14.6.1@4400,5170 4467.64,5170 U10.6.1@4510,5127.64
NetC35.6_2: C35.6.2 R17.6.2 U10.6.2 | length 459.7
  Top Layer w12: R17.6.2@4250,5160 4260,5160 4326.54,5093.46 4326.54,5053.46 4350,5030 4530,5030 4560,5060 U10.6.2@4560,5120
NetC35.7_1: C35.7.1 R14.7.1 R18.7.1 U10.7.1 | length 458.7
  Top Layer w12: R18.7.1@4233.46,4800 4283.46,4750 4360,4750 4393.46,4716.54 C35.7.1@4393.46,4580 ; R14.7.1@4400,4680 4467.64,4680 U10.7.1@4510,4637.64
NetC35.7_2: C35.7.2 R17.7.2 U10.7.2 | length 459.7
  Top Layer w12: R17.7.2@4250,4670 4260,4670 4326.54,4603.46 4326.54,4563.46 4350,4540 4530,4540 4560,4570 U10.7.2@4560,4630
NetC35.8_1: C35.8.1 R14.8.1 R18.8.1 U10.8.1 | length 458.7
  Top Layer w12: R18.8.1@4233.46,4310 4283.46,4260 4360,4260 4393.46,4226.54 C35.8.1@4393.46,4090 ; R14.8.1@4400,4190 4467.64,4190 U10.8.1@4510,4147.64
NetC35.8_2: C35.8.2 R17.8.2 U10.8.2 | length 459.7
  Top Layer w12: R17.8.2@4250,4180 4260,4180 4326.54,4113.46 4326.54,4073.46 4350,4050 4530,4050 4560,4080 U10.8.2@4560,4140
NetC35.9_1: C35.9.1 R14.9.1 R18.9.1 U10.9.1 | length 458.7
  Top Layer w12: R18.9.1@4233.46,3820 4283.46,3770 4360,3770 4393.46,3736.54 C35.9.1@4393.46,3600 ; R14.9.1@4400,3700 4467.64,3700 U10.9.1@4510,3657.64
NetC35.9_2: C35.9.2 R17.9.2 U10.9.2 | length 459.7
  Top Layer w12: R17.9.2@4250,3690 4260,3690 4326.54,3623.46 4326.54,3583.46 4350,3560 4530,3560 4560,3590 U10.9.2@4560,3650
NetC35.10_1: C35.10.1 R14.10.1 R18.10.1 U10.10.1 | length 458.7
  Top Layer w12: R18.10.1@4233.46,3330 4283.46,3280 4360,3280 4393.46,3246.54 C35.10.1@4393.46,3110 ; R14.10.1@4400,3210 4467.64,3210 U10.10.1@4510,3167.64
NetC35.10_2: C35.10.2 R17.10.2 U10.10.2 | length 459.7
  Top Layer w12: R17.10.2@4250,3200 4260,3200 4326.54,3133.46 4326.54,3093.46 4350,3070 4530,3070 4560,3100 U10.10.2@4560,3160
NetC36.1_1: C36.1.1 R15.1.1 R22.1.1 U10.1.14 | length 934.5
  Top Layer w12: R15.1.1@4233.46,7880 4233.46,7883.46 4280,7930 4370,7930 4393.46,7906.54 C36.1.1@4393.46,7880 4480,7880 4510,7850 U10.1.14@4510,7822.36 ; C36.1.1@4393.46,7883.46 4440,7930 4876.54,7930 R22.1.1@4916.54,7890
NetC36.1_2: C36.1.2 R19.1.2 U10.1.13 | length 401.1
  Top Layer w12: C36.1.2@4326.54,7880 4326.54,7843.46 4340,7830 4390,7830 4413.46,7806.54 4413.46,7776.54 4450,7740 4540,7740 4560,7760 U10.1.13@4560,7822.36
NetC36.2_1: C36.2.1 R15.2.1 R22.2.1 U10.2.14 | length 934.5
  Top Layer w12: R15.2.1@4233.46,7390 4233.46,7393.46 4280,7440 4370,7440 4393.46,7416.54 C36.2.1@4393.46,7390 4480,7390 4510,7360 U10.2.14@4510,7332.36 ; C36.2.1@4393.46,7393.46 4440,7440 4876.54,7440 R22.2.1@4916.54,7400
NetC36.2_2: C36.2.2 R19.2.2 U10.2.13 | length 401.1
  Top Layer w12: C36.2.2@4326.54,7390 4326.54,7353.46 4340,7340 4390,7340 4413.46,7316.54 4413.46,7286.54 4450,7250 4540,7250 4560,7270 U10.2.13@4560,7332.36
NetC36.3_1: C36.3.1 R15.3.1 R22.3.1 U10.3.14 | length 934.5
  Top Layer w12: R15.3.1@4233.46,6900 4233.46,6903.46 4280,6950 4370,6950 4393.46,6926.54 C36.3.1@4393.46,6900 4480,6900 4510,6870 U10.3.14@4510,6842.36 ; C36.3.1@4393.46,6903.46 4440,6950 4876.54,6950 R22.3.1@4916.54,6910
NetC36.3_2: C36.3.2 R19.3.2 U10.3.13 | length 401.1
  Top Layer w12: C36.3.2@4326.54,6900 4326.54,6863.46 4340,6850 4390,6850 4413.46,6826.54 4413.46,6796.54 4450,6760 4540,6760 4560,6780 U10.3.13@4560,6842.36
NetC36.4_1: C36.4.1 R15.4.1 R22.4.1 U10.4.14 | length 934.5
  Top Layer w12: R15.4.1@4233.46,6410 4233.46,6413.46 4280,6460 4370,6460 4393.46,6436.54 C36.4.1@4393.46,6410 4480,6410 4510,6380 U10.4.14@4510,6352.36 ; C36.4.1@4393.46,6413.46 4440,6460 4876.54,6460 R22.4.1@4916.54,6420
NetC36.4_2: C36.4.2 R19.4.2 U10.4.13 | length 401.1
  Top Layer w12: C36.4.2@4326.54,6410 4326.54,6373.46 4340,6360 4390,6360 4413.46,6336.54 4413.46,6306.54 4450,6270 4540,6270 4560,6290 U10.4.13@4560,6352.36
NetC36.5_1: C36.5.1 R15.5.1 R22.5.1 U10.5.14 | length 934.5
  Top Layer w12: R15.5.1@4233.46,5920 4233.46,5923.46 4280,5970 4370,5970 4393.46,5946.54 C36.5.1@4393.46,5920 4480,5920 4510,5890 U10.5.14@4510,5862.36 ; C36.5.1@4393.46,5923.46 4440,5970 4876.54,5970 R22.5.1@4916.54,5930
NetC36.5_2: C36.5.2 R19.5.2 U10.5.13 | length 401.1
  Top Layer w12: C36.5.2@4326.54,5920 4326.54,5883.46 4340,5870 4390,5870 4413.46,5846.54 4413.46,5816.54 4450,5780 4540,5780 4560,5800 U10.5.13@4560,5862.36
NetC36.6_1: C36.6.1 R15.6.1 R22.6.1 U10.6.14 | length 934.5
  Top Layer w12: R15.6.1@4233.46,5390 4233.46,5393.46 4280,5440 4370,5440 4393.46,5416.54 C36.6.1@4393.46,5390 4480,5390 4510,5360 U10.6.14@4510,5332.36 ; C36.6.1@4393.46,5393.46 4440,5440 4876.54,5440 R22.6.1@4916.54,5400
NetC36.6_2: C36.6.2 R19.6.2 U10.6.13 | length 401.1
  Top Layer w12: C36.6.2@4326.54,5390 4326.54,5353.46 4340,5340 4390,5340 4413.46,5316.54 4413.46,5286.54 4450,5250 4540,5250 4560,5270 U10.6.13@4560,5332.36
NetC36.7_1: C36.7.1 R15.7.1 R22.7.1 U10.7.14 | length 934.5
  Top Layer w12: R15.7.1@4233.46,4900 4233.46,4903.46 4280,4950 4370,4950 4393.46,4926.54 C36.7.1@4393.46,4900 4480,4900 4510,4870 U10.7.14@4510,4842.36 ; C36.7.1@4393.46,4903.46 4440,4950 4876.54,4950 R22.7.1@4916.54,4910
NetC36.7_2: C36.7.2 R19.7.2 U10.7.13 | length 401.1
  Top Layer w12: C36.7.2@4326.54,4900 4326.54,4863.46 4340,4850 4390,4850 4413.46,4826.54 4413.46,4796.54 4450,4760 4540,4760 4560,4780 U10.7.13@4560,4842.36